# Altium PCB FAT51.PcbDoc
Units mm, origin at the board's own origin, x right, y up, seen from the top; angles counter-clockwise.
Board outline 497.18 x 312.08 mm, 2 copper layers (Top Layer, Bottom Layer); 125 components, 622 nets, 417 pads, 125 vias.
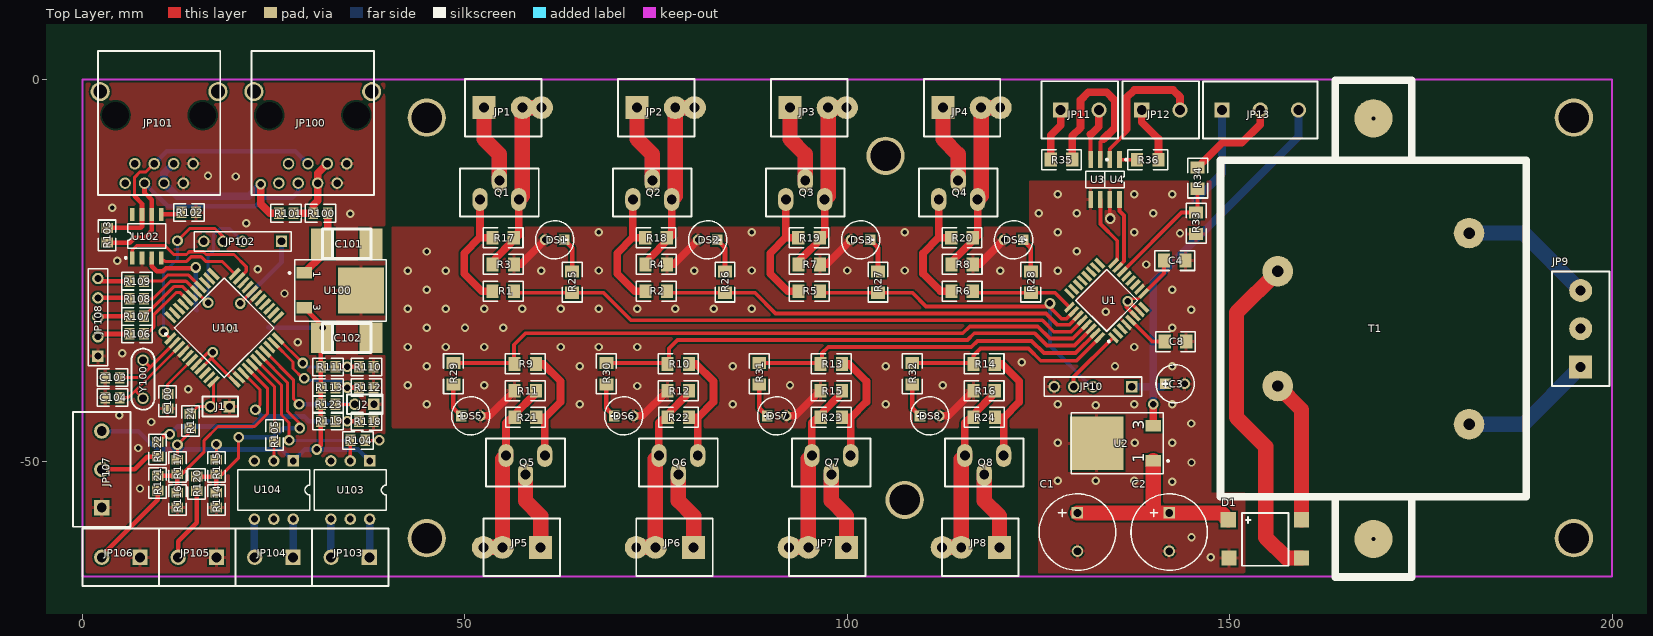
[diagram p0: Top Layer view]
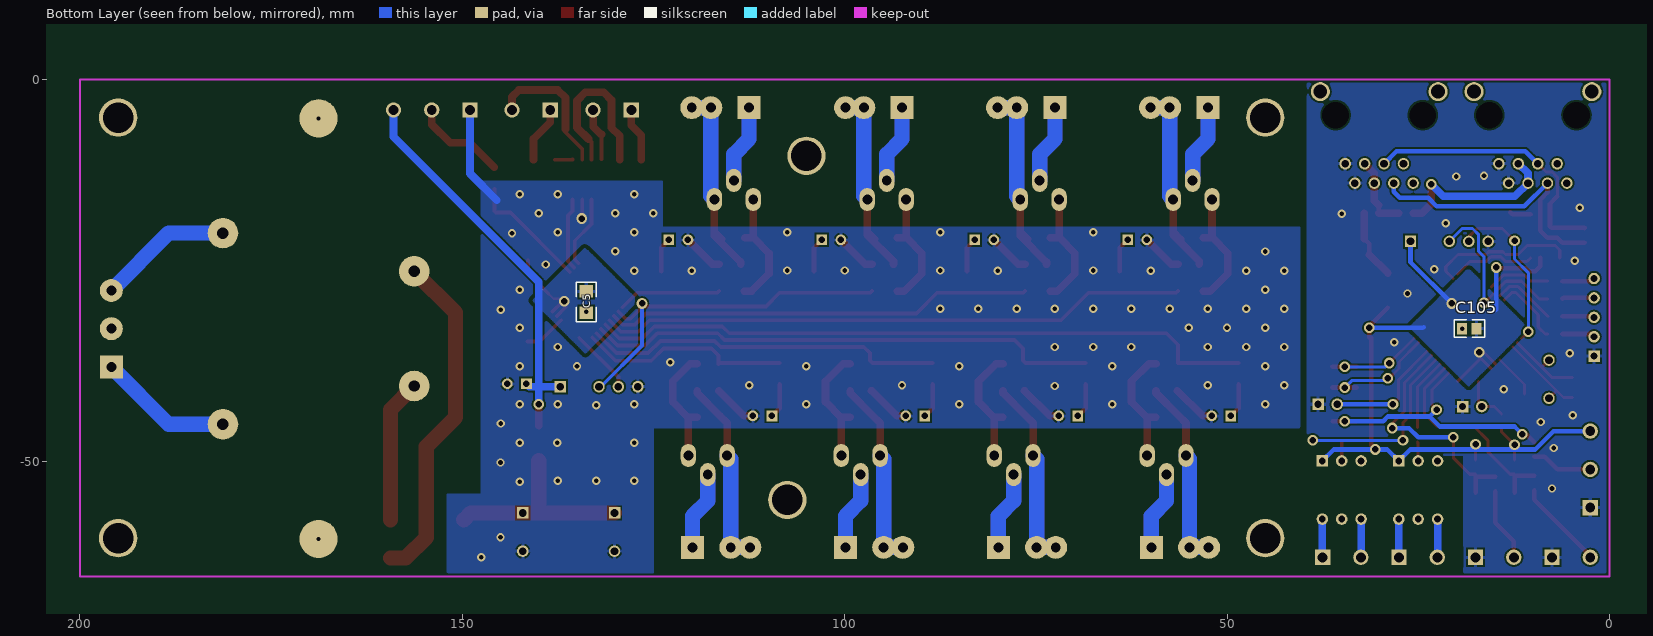
[diagram p1: Bottom Layer view, seen from below]

## Layer stack, top to bottom
Top Layer: signal copper 0.0356
Dielectric: dielectric 0.32, FR-4, Dk 4.8
Bottom Layer: signal copper 0.0356

## Board outline
-16.394,-120.931 -16.394,181.669 480.781,181.669 480.781,-130.406 -16.394,-130.406

## Design rules (kind name [scope] priority, off if disabled: settings)
Clearance Clearance_2 [InPoly vs HasPad('Free-0') Or
HasPad('Free-1') Or
HasPad('Free-2') Or
HasPad('Free-3') Or
HasPad('Free-4') Or
HasPad('Free-5') Or
HasPad('Free-6') Or
HasPad('Free-7') Or
HasPad('Free-8') Or
HasPad('Free-9') Or
HasPad('Free-10') Or
HasPad('Free-11') Or
HasPad('Free-12')] p1: gap=2
Clearance Clearance_1 [InPoly vs InPoly] p2: gap=0.5
Clearance [All] p3: gap=0.254
ComponentClearance [All] p1: gap=0.254 collisioncheckmode=0
HoleSize [All] p1: absolutevalues=TRUE maxlimit=5 minlimit=0.025 maxpercent=80.000 minpercent=20.000
PolygonConnect PolygonConnect_1 [InNet('GND_H') or  InNet('+27v')] p1: connectstyle=Relief reliefconductorwidth=0.8 reliefentries=4 polygonreliefangle="90 Angle"
PolygonConnect [All] p2: connectstyle=Relief reliefconductorwidth=0.4 reliefentries=4 polygonreliefangle="90 Angle"
RoutingLayers [All] p1: top layer=Horizontal bottom layer=Vertical
RoutingVias [All] p1: holewidth=0.85 width=1.4 viastyle="Through Hole" minholewidth=0.5 minwidth=1 maxholewidth=1 maxwidth=1.5
SolderMaskExpansion [All] p1: expansion=0.102
TestPointUsage [All] p1: valid=0 allowmultiple=FALSE
Testpoint [All] p1: side=15 testpointundercomponent=TRUE minsize=1.016 maxsize=2.54 preferedsize=1.524 minholesize=0 maxholesize=1.016 preferedholesize=0.813 testpointgrid=0.025 style=1023 order=-539222988
Width [All] p1: maxlimit=2 minlimit=0.254 preferedwidth=0.254 toplayer_minwidth=0.3 toplayer_prefwidth=0.3 bottomlayer_minwidth=0.3 bottomlayer_prefwidth=1 minimp=50.000000 maximp=50.000000 favimp=50.000000
15 further rules are at their usual default settings.

## Classes and differential pairs
component class fat51p: C1 C2 C3 C4 C5 C8 D1 DS1 DS2 DS3 DS4 DS5 DS6 DS7 DS8 JP1 JP2 JP3 JP4 JP5 JP6 JP7 JP8 JP9 JP10 JP11 JP12 JP13 Q1 Q2 Q3 Q4 Q5 Q6 Q7 Q8 R1 R2 R3 R4 R5 R6 R7 R8 R9 R10 R11 R12 R13 R14 R15 R16 R17 R18 R19 R20 R21 R22 R23 R24 R25 R26 R27 R28 R29 R30 R31 R32 R33 R34 R35 R36 T1 U1 U2 U3 U4
component class UD: C100 C101 C102 C103 C104 C105 J1 J2 JP100 JP101 JP102 JP103 JP104 JP105 JP106 JP107 JP108 R100 R101 R102 R103 R104 R105 R106 R107 R108 R109 R110 R111 R112 R113 R114 R115 R116 R117 R118 R119 R120 R121 R122 R123 R124 U100 U101 U102 U103 U104 Y100

## Components (designator, comment, footprint, x,y, rotation, side; value= is the part's Value field where it differs from the comment)
C1 "" el5 130.1,-61.7 r90 top
C2 "" el5 142.1,-61.7 r90 top
C3 "" el3 141.6,-39.8 r0 top
C4 "Cap" _1206 142.8,-23.7 r180 top
C5 "Cap" _1206 133.8,-29.1 r90 bottom
C8 "1.0" _1206 142.9,-34.3 r180 top
C100 "1.0" _0805 11.1,-42.1 r90 top
C101 "10.0x25 tantal" CAP_EL_6_3 31.4,-21.5 r0 top
C102 "10.0x25 tantal" CAP_EL_6_3 31.4,-33.8 r0 top
C103 "10pF" _0805 3.9,-39 r0 top
C104 "10pF" _0805 3.9,-41.6 r0 top
C105 "1.0" _0805 18.306,-32.6 r0 bottom
D1 "DB107" DF01 159.4,-62.6 r180 top
DS1 "LED0" el3 63,-21 r180 top
DS2 "LED0" el3 83,-21 r180 top
DS3 "LED0" el3 103,-21 r180 top
DS4 "LED0" el3 123,-21 r180 top
DS5 "LED0" el3 49.5,-44 r0 top
DS6 "LED0" el3 69.5,-44 r0 top
DS7 "LED0" el3 89.5,-44 r0 top
DS8 "LED0" el3 109.5,-44 r0 top
J1 "" jmp 19.2,-42.8 r180 top
J2 "" jmp 38.1,-42.5 r180 top
JP1 "BT5-2" BT5-2-1#1 55,-3.7 r0 top
JP2 "BT5-2" BT5-2-1#1 75,-3.7 r0 top
JP3 "BT5-2" BT5-2-1#1 95,-3.7 r0 top
JP4 "BT5-2" BT5-2-1#1 115,-3.7 r0 top
JP5 "BT5-2" BT5-2-1#1 57.4,-61.2 r180 top
JP6 "BT5-2" BT5-2-1#1 77.4,-61.2 r180 top
JP7 "BT5-2" BT5-2-1#1 97.4,-61.2 r180 top
JP8 "BT5-2" BT5-2-1#1 117.4,-61.2 r180 top
JP9 "Header 3" BT5-3#1 195.9,-37.6 r90 top
JP10 "" HDR1X5_uart 137.2,-40.2 r180 top
JP11 "BT5-2" BT5-2-1#2 130.4,-4 r0 top
JP12 "BT5-2" BT5-2-1#2 141,-4 r0 top
JP13 "Header 3" BT5-3#2 149,-4 r0 top
JP100 "MHDR1X8" 8i8p-5306 30.1,-12.3 r180 top
JP101 "MHDR1X8" 8i8p-5306 10,-12.3 r180 top
JP102 "" HDR1X5_uart 26,-21.2 r180 top
JP103 "BT5-2" BT5-2-1#2 35,-62.5 r180 top
JP104 "BT5-2" BT5-2-1#2 25,-62.5 r180 top
JP105 "BT5-2" BT5-2-1#2 15,-62.5 r180 top
JP106 "BT5-2" BT5-2-1#2 5,-62.5 r180 top
JP107 "Header 3" BT5-3#2 2.5,-56 r90 top
JP108 "Header 5" HDR1X5 2,-36.2 r90 top (schematic designator JP9)
Q1 "IRF1407" 7805_2 56,-15.7 r0 top
Q2 "IRF1407" 7805_2 76,-15.7 r0 top
Q3 "IRF1407" 7805_2 96,-15.7 r0 top
Q4 "IRF1407" 7805_2 116,-15.7 r0 top
Q5 "IRF1407" 7805_2 56.4,-49.2 r180 top
Q6 "IRF1407" 7805_2 76.4,-49.2 r180 top
Q7 "IRF1407" 7805_2 96.4,-49.2 r180 top
Q8 "IRF1407" 7805_2 116.4,-49.2 r180 top
R1 "1K0" _1206 55,-27.7 r180 top
R2 "1K0" _1206 75,-27.7 r180 top
R3 "1K0" _1206 55,-24.2 r180 top
R4 "1K0" _1206 75,-24.2 r180 top
R5 "1K0" _1206 95,-27.7 r180 top
R6 "1K0" _1206 115,-27.7 r180 top
R7 "1K0" _1206 95,-24.2 r180 top
R8 "1K0" _1206 115,-24.2 r180 top
R9 "1K0" _1206 57.9,-37.2 r0 top
R10 "1K0" _1206 77.9,-37.2 r0 top
R11 "1K0" _1206 57.9,-40.7 r0 top
R12 "1K0" _1206 77.9,-40.7 r0 top
R13 "1K0" _1206 97.9,-37.2 r0 top
R14 "1K0" _1206 117.9,-37.2 r0 top
R15 "1K0" _1206 97.9,-40.7 r0 top
R16 "1K0" _1206 117.9,-40.7 r0 top
R17 "20K" _1206 55,-20.7 r0 top
R18 "20K" _1206 75,-20.7 r0 top
R19 "20K" _1206 95,-20.7 r0 top
R20 "20K" _1206 115,-20.7 r0 top
R21 "20K" _1206 57.9,-44.2 r180 top
R22 "20K" _1206 77.9,-44.2 r180 top
R23 "20K" _1206 97.9,-44.2 r180 top
R24 "20K" _1206 117.9,-44.2 r180 top
R25 "1K0" _1206 64,-26.5 r90 top
R26 "1K0" _1206 84,-26.5 r90 top
R27 "1K0" _1206 104,-26.5 r90 top
R28 "1K0" _1206 124,-26.5 r90 top
R29 "1K0" _1206 48.5,-38.5 r270 top
R30 "1K0" _1206 68.5,-38.5 r270 top
R31 "1K0" _1206 88.5,-38.5 r270 top
R32 "1K0" _1206 108.5,-38.5 r270 top
R33 "1K0" _1206 145.6,-18.8 r90 top
R34 "1K0" _1206 145.8,-12.9 r90 top
R35 "1K0" _1206 128,-10.5 r180 top
R36 "1K0" _1206 139.3,-10.5 r0 top
R100 "1R0" _0805 31.1,-17.5 r0 top
R101 "1R0" _0805 26.6,-17.5 r0 top
R102 "1R0" _0805 13.9,-17.4 r180 top
R103 "K10" _0805 3.2,-20.4 r90 top
R104 "1K0" _0805 36,-47.2 r0 top (schematic designator R?)
R105 "1K0" _0805 25.1,-46.5 r90 top (schematic designator R?)
R106 "1K0" _0805 7.1,-33.3 r180 top (schematic designator R25)
R107 "1K0" _0805 7.1,-31 r180 top (schematic designator R26)
R108 "1K0" _0805 7.1,-28.7 r180 top (schematic designator R27)
R109 "1K0" _0805 7.1,-26.4 r180 top (schematic designator R28)
R110 "1K0" _0805 37.1,-37.6 r0 top
R111 "1K0" _0805 32.1,-37.6 r0 top
R112 "1K0" _0805 37.1,-40.3 r0 top
R113 "1K0" _0805 32.1,-40.3 r0 top
R114 "1K0" _0805 17.5,-55 r270 top
R115 "1K0" _0805 17.5,-50.7 r90 top
R116 "1K0" _0805 12.4,-55 r270 top
R117 "1K0" _0805 12.4,-50.7 r90 top
R118 "1K0" _0805 37.1,-44.7 r0 top
R119 "1K0" _0805 32.1,-44.7 r180 top
R120 "K10" _0805 14.9,-52.9 r90 top
R121 "K10" _0805 9.8,-52.8 r90 top
R122 "K10" _0805 9.8,-48.4 r90 top
R123 "1K0" _0805 32.1,-42.5 r0 top
R124 "1K0" _0805 14.1,-44.7 r90 top
T1 "BV EI 422 1222" "BV EI 422 1226_L" 168.8,-32.6 r90 top
U1 "STM8S105K" QFP7X7-G32/X.5N 133.9,-28.9 r135 top
U2 "MC78M05CDT" SIP-G3/Z11.05#1 136.3,-47.6 r90 top
U3 "Optoisolator1" SO-G4 133.1,-10.5 r180 top
U4 "Optoisolator1" SO-G4 135.6,-10.5 r180 top
U100 "MC78M05CDT" SIP-G3/Z11.05#2 32.7,-27.6 r270 top
U101 "STM8S208S6" QFP10X10-G44/G10N 18.5,-32.5 r45 top
U102 "TJA1050" SO-G8/D5 8.4,-20.5 r0 top
U103 "Opto TRIAC" dip-6 35,-53.7 r180 top
U104 "Opto TRIAC" dip-6 25,-53.7 r180 top
Y100 "10MHz" QWARZ1 7.9,-36.7 r270 top

## Footprints (in the part's own frame and the unit in brackets; to place one, negate y for a bottom-side part, rotate by r counter-clockwise, add the part's x,y. Pads: shape width x height; smd on the part's side, far side on the other; paste and mask are expansions set on the pad)
8i8p-5306 [mm]
  round 2.5 hole 1.8: 0(-7.7,-10.7) 0(7.7,-10.7)
  round 1.5 hole 3.5: 0(-5.7,-7.62) 0(5.7,-7.62)
  round 1.5 hole 1: 1(-4.445,-1.27) 2(-3.175,1.27) 3(-1.905,-1.27) 4(-0.635,1.27) 5(0.635,-1.27) 6(1.905,1.27) 7(3.175,-1.27) 8(4.445,1.27)
  silkscreen extent -8,-16 8,2.8
7805_2 [mm]
  oval 2x3 hole 1.3: 1(-4.042,-0.011) 2(-1.502,2.489) 3(1.038,-0.011)
  silkscreen extent -6.65,-2.21 3.65,4.05
_0805 [mm]
  rect 1.3x1.5 smd: 1(-0.942,-0.005) 2(0.958,-0.005)
  silkscreen extent -1.99,-1.16 2.01,1.14
_1206 [mm]
  rect 1.6x1.8 smd: 1(-1.412,-0.007) 2(1.388,-0.007)
  silkscreen extent -2.61,-1.31 2.59,1.29
BT5-2-1#1 [mm]
  round 2 on Top Overlay: 0(-2.5,-4)
  rect 3x3 hole 1.3: 1(-2.5,0)
  round 3 hole 1.3: 2(2.5,0)
  silkscreen extent -5,-3.75 5,3.75
BT5-2-1#2 [mm]
  round 2 on Top Overlay: 0(-2.5,-4)
  rect 2x2 hole 1.3: 1(-2.5,0)
  round 2 hole 1.3: 2(2.5,0)
  silkscreen extent -5,-3.75 5,3.75
BT5-3#1 [mm]
  round 2 on Top Overlay: 0(-0.001,-4.001)
  rect 3x3 hole 1.3: 1(-0.001,-0.001)
  round 3 hole 1.3: 2(4.999,-0.001) 3(9.999,-0.001)
  silkscreen extent -2.5,-3.75 12.5,3.75
BT5-3#2 [mm]
  round 2 on Top Overlay: 0(-0.001,-4.001)
  rect 2x2 hole 1.3: 1(-0.001,-0.001)
  round 2 hole 1.3: 2(4.999,-0.001) 3(9.999,-0.001)
  silkscreen extent -2.5,-3.75 12.5,3.75
"BV EI 422 1226_L" [mm]
  round 5 hole 0.5: 0(-27.5,0) 0(27.5,0)
  round 4 hole 1.5: 1(-12.5,-12.5) 5(12.5,-12.5) 7(-7.5,12.5) 9(7.5,12.5)
  silkscreen extent -32.47,-20 32.47,20
CAP_EL_6_3 [mm]
  rect 3x4 smd: 1(-0.011,0.006) 2(6.339,0.006)
  silkscreen extent -0.01,-1.9 6.34,1.91
DF01 [mm]
  rect 2x2 smd: 1(9.496,0.002) 2(-0.004,0.002) 3(9.596,-4.998) 4(-0.004,-4.998)
  silkscreen extent 1.7,-5.9 7.8,1
dip-6 [mm]
  rect 1.5x1.5 hole 0.9: 1(-2.54,-3.81)
  round 1.5 hole 0.9: 2(0,-3.81) 3(2.54,-3.81) 4(2.54,3.81) 5(0,3.81) 6(-2.54,3.81)
  silkscreen extent -4.7,-2.65 4.7,2.65
el3 [mm]
  rect 1.4x1.4 hole 0.85: 1(0.011,-0.008)
  round 1.4 hole 0.85: 2(2.511,-0.008)
  silkscreen extent -1.23,-2.51 3.76,2.49
el5 [mm]
  rect 1.5x1.5 hole 1: 1(5.001,0.007)
  round 1.5 hole 1: 2(0.001,0.007)
  silkscreen extent -2.5,-4.99 7.5,5
HDR1X5 [mm]
  rect 1.5x1.5 hole 0.9: 1(0,0)
  round 1.5 hole 0.9: 2(2.54,0) 3(5.08,0) 4(7.62,0) 5(10.16,0)
  silkscreen extent -1.27,-1.27 11.43,1.27
HDR1X5_uart [mm]
  rect 1.5x1.5 hole 1: 1(-0.008,-0.009)
  round 1.5 hole 1: 3(5.072,-0.009) 4(7.612,-0.009) 5(10.152,-0.009)
  silkscreen extent -1.28,-1.28 11.42,1.26
jmp [mm]
  rect 1.5x1.5 hole 0.95: 1(0.008,-0.012)
  round 1.5 hole 0.95: 2(2.508,-0.012)
  silkscreen extent -1.09,-1.31 3.51,1.29
QFP7X7-G32/X.5N [mm]
  rect 1.65x0.5 smd: 1(-4.082,2.794) 2(-4.082,1.994) 3(-4.082,1.194) 4(-4.082,0.394) 5(-4.082,-0.406) 6(-4.082,-1.206) 7(-4.082,-2.006) 8(-4.082,-2.806) 17(4.068,-2.806) 18(4.068,-2.006) 19(4.068,-1.206) 20(4.068,-0.406) 21(4.068,0.394) 22(4.068,1.194) 23(4.068,1.994) 24(4.068,2.794)
  rect 0.5x1.65 smd: 9(-2.807,-4.081) 10(-2.007,-4.081) 11(-1.207,-4.081) 12(-0.407,-4.081) 13(0.393,-4.081) 14(1.193,-4.081) 15(1.993,-4.081) 16(2.793,-4.081) 25(2.793,4.069) 26(1.993,4.069) 27(1.193,4.069) 28(0.393,4.069) 29(-0.407,4.069) 30(-1.207,4.069) 31(-2.007,4.069) 32(-2.807,4.069)
  silkscreen extent -4.13,-2.86 2.84,3.72
QFP10X10-G44/G10N [mm]
  rect 1.9x0.5 smd: 1(-5.943,3.998) 2(-5.943,3.198) 3(-5.943,2.398) 4(-5.943,1.598) 5(-5.943,0.798) 6(-5.943,-0.002) 7(-5.943,-0.802) 8(-5.943,-1.602) 9(-5.943,-2.402) 10(-5.943,-3.202) 11(-5.943,-4.002) 23(5.957,-4.002) 24(5.957,-3.202) 25(5.957,-2.402) 26(5.957,-1.602) 27(5.957,-0.802) 28(5.957,-0.002) 29(5.957,0.798) 30(5.957,1.598) 31(5.957,2.398) 32(5.957,3.198) 33(5.957,3.998)
  rect 0.5x1.9 smd: 12(-3.993,-5.952) 13(-3.193,-5.952) 14(-2.393,-5.952) 15(-1.593,-5.952) 16(-0.793,-5.952) 17(0.007,-5.952) 18(0.807,-5.952) 19(1.607,-5.952) 20(2.407,-5.952) 21(3.207,-5.952) 22(4.007,-5.952) 34(4.007,5.948) 35(3.207,5.948) 36(2.407,5.948) 37(1.607,5.948) 38(0.807,5.948) 39(0.007,5.948) 40(-0.793,5.948) 41(-1.593,5.948) 42(-2.393,5.948) 43(-3.193,5.948) 44(-3.993,5.948)
  silkscreen extent -6.07,-4.6 4.61,4.92
QWARZ1 [mm]
  round 1.5 hole 1: 1(0.008,0) 2(5.008,0)
  silkscreen extent -1.49,-1.5 6.51,1.5
SIP-G3/Z11.05#1 [mm]
  rect 1.5x2 smd: 1(-2.283,-3.709) 3(2.287,-3.709)
  rect 7x7 smd: 4(0.002,3.691)
  silkscreen extent -4,-5.76 4,7.02
SIP-G3/Z11.05#2 [mm]
  rect 1.5x2 smd: 1(-2.283,-3.709) 3(2.287,-3.709)
  rect 6x6 smd: 4(0.002,3.691)
  silkscreen extent -4,-5.76 4,7.02
SO-G4 [mm]
  rect 0.6x2.2 smd: 1(0.003,0) 2(1.273,0) 3(1.273,5.2) 4(0.003,5.2)
  silkscreen extent -0.97,-0.13 1.91,3.7
SO-G8/D5 [mm]
  rect 0.6x1.7 smd: 1(-1.908,-2.852) 2(-0.638,-2.852) 3(0.632,-2.852) 4(1.902,-2.852) 5(1.902,2.848) 6(0.632,2.848) 7(-0.638,2.848) 8(-1.908,2.848)
  silkscreen extent -2.88,-2.98 2.5,1.6

## Part data
C1 C2 C101 C102: library part "Cap Pol1", "Polarized Capacitor (Radial)"
C3: library part "Cap Pol", "Polarized Capacitor (Radial)"
C4 C5: "Capacitor"
C8 C100 C103 C104 C105: library part "Cap Semi", "Capacitor (Semiconductor SIM Model)"
D1: library part Bridge1, "Full Wave Diode Bridge"
DS1 DS2 DS3 DS4 DS5 DS6 DS7 DS8: "Typical INFRARED GaAs LED"
J1 J2: library part JMP, "Switch"
JP1 JP2 JP3 JP4 JP5 JP6 JP7 JP8 JP9 JP11 JP12 JP13 JP103 JP104 JP105 JP106 JP107: "Header, 3-Pin"
JP10 JP102: library part SWIM_CONN
JP100 JP101: "Header, 8-Pin"
JP108: "Header, 5-Pin"
Q1 Q2 Q3 Q4 Q5 Q6 Q7 Q8: library part IRFR120, "HEXFET N-Channel Power MOSFET"
R1 R2 R3 R4 R5 R6 R7 R8 R9 R10 R11 R12 R13 R14 R15 R16 R17 R18 R19 R20 R21 R22 R23 R24 R25 R26 R27 R28 R29 R30 R31 R32 R33 R34 R35 R36 R100 R101 R102 R103 R104 R105 R106 R107 R108 R109 R110 R111 R112 R113 R114 R115 R116 R117 R118 R119 R120 R121 R122 R123 R124: library part Res2, "Resistor"
T1: library part "BV EI 302"
U2 U100: "Three-Terminal Medium Current Positive Voltage Regulator"
U3 U4: "Optoisolator"
U103 U104: "Opto-Triac"
Y100: library part XTAL, "Crystal Oscillator"

## Free pads (board coordinates)
  round 3 hole 1.3: 0(52.4,-61.2) 1(72.4,-61.2) 2(92.4,-61.2) 3(112.4,-61.2) 4(60,-3.7) 5(80,-3.7) 6(99.9,-3.7) 7(120,-3.7)
  round 5 hole 4: 21(45,-60) 21(45,-5) 21(105,-10) 21(107.5,-55) 21(195,-60) 21(195,-5)

## Via types
v1: diameter 1.1, hole 0.6, Top Layer to Bottom Layer, 98 vias
v2: diameter 1.4, hole 0.85, Top Layer to Bottom Layer, 27 vias

## Nets (pads, with @x,y where several pads share a name; then routed paths per layer and width w, separated by ;. In a path a pad name is that pad's centre, name@x,y a point inside that pad or via, vN(x,y) a via of type N, cw(c..) or ccw(c..) an arc to the next point about the centre after c; other vN are vias at no path point)
+3V3: 
+5V: C3.1 C4.2 C5.2 JP10.1 JP13.3 U1.6 U1.7 U1.9 U2.3 | length 66
  Top Layer w0.3: v2(136.666,-29.034) 137,-28.7 138.07,-28.7 U1.9
  Top Layer w0.5: v2@136.5,-29.1 136.5,-29.794 U1.6 ; v2@136.666,-29.1 136.937,-29.1 U1.7 ; U1.9 141.412,-25.358 C4.2
  Top Layer w1: U2.3 v2@140.009,-42.509
  Bottom Layer w1: JP10.1 141.229,-40.191 C3.1 ; v2(140,-42.5) 140,-26.5 158.999,-7.501 JP13.3
+5V_UD: C102.1 C105.1 JP102.1 JP107.3 R111.1 R113.1 R115.2 R117.2 R119.2 R123.1 R124.1 U100.3 U101.7 U101.8 U101.12 U101.29 U102.3 U103.1 U104.1 | length 109.1
  Top Layer w0.4: R117.2 12.405,-47.795 14.105,-46.095 R124.1 ; U101.7 16.434,-35.7 v2(17,-35.7) 17,-36.647 U101.12 ; U101.8 v2@17,-36.265 ; R115.2 v2@17.505,-47.705 ; v2(20.6,-29.3) 20.6,-29.271 U101.29
  Top Layer w0.6: U102.3 9.032,-24.432 9.7,-25.1 10.5,-25.1 10.9,-24.7 14.6,-24.7 14.7,-24.6 v2(14.8,-24.6) ; U100.3 31.389,-32.286 C102.1 ; v2(30.6,-48.4) 31.142,-47.858 C102.1@31.142,-33.794 ; C102.1@31.142,-32.748 v2(31.389,-32.5)
  Bottom Layer w0.6: JP107.3 7.301,-46.001 9.7,-48.4 26.05,-48.4 U104.1 29.03,-48.4 36.05,-48.4 U103.1 ; v2@12.4,-48.4 v2(12.4,-47.8) ; v2(14.8,-24.6) 14.8,-30.094 14.906,-30.2 ; v2@17.5,-48.4 v2(17.5,-47.7) ; v2(20.6,-29.3) 26.008,-23.892 JP102.1 ; 24.3,-32.407 24.393,-32.5 v2(31.389,-32.5) v2@31.389,-32.789
+5VI: 
+12V: 
+12VF: 
+12VI: 
A: 
A1: 
A2: 
A3: 
A4: U101.9
A5: U101.10
A6: J1.2 R124.2 U101.11 | length 6.4
  Top Layer w0.4: R124.2 15.058,-42.788 J1.2 17.127,-42.353 U101.11
AA: 
AGND: 
AREF: 
AVCC: 
AVCCM: 
B: 
B0: R112.1 R113.2 U101.21 | length 15.9
  Top Layer w0.4: U101.21 27.5,-36.965 27.5,-37.8 28.8,-39.1 v2@28.8,-39.4
  Top Layer w0.6: R113.2@33.042,-40.295 R112.1@36.242,-40.295
  Bottom Layer w0.4: v2@28.8,-39.4 33.7,-39.4 v2(34.6,-40.3)
  other v2: 29,-39.1
B2: J2.2 R123.2 U101.19 | length 18.6
  Top Layer w0.4: U101.19 27.6,-39.328 27.6,-41.8 v2(28.3,-42.5) ; R123.2 33.063,-42.5 J2.2@35.58,-42.5
  Bottom Layer w0.6: v2(28.3,-42.5) 35.58,-42.5 J2.2
B3: R114.1 R115.1 R120.2 U101.18 | length 31.5
  Top Layer w0.4: R115.1 18.258,-51.642 20.4,-49.5 v2(20.4,-46.8) ; U101.18 26.8,-39.659 26.8,-43.4 28.4,-45 v2(28.4,-45.6)
  Top Layer w0.6: R120.2 17.358,-51.942 R115.1@17.5,-51.8 ; R114.1 R115.1@17.495,-51.805
  Bottom Layer w0.6: v2(20.4,-46.8) 25,-46.8 26.2,-45.6 v2(28.4,-45.6)
B4: R104.2 U101.17 | length 25.9
  Top Layer w0.4: U101.17 26,-39.99 26,-43.9 27,-44.9 v2(27,-47.2) ; R104.2 38.795,-47.205 v2(38.8,-47.2)
  Bottom Layer w0.4: v2(27,-47.2) v2(38.8,-47.2)
B5: R105.2 U101.16 | length 9.5
  Top Layer w0.4: U101.16 25.105,-40.227 R105.2
B6: R116.1 R117.1 R121.2 U101.15 | length 27.7
  Top Layer w0.4: R117.1 12.958,-51.642 15.9,-48.7 15.9,-47.2 17.7,-45.4 22.5,-45.4 24.2,-43.7 24.2,-40.453 U101.15
  Top Layer w0.6: R121.2 12.358,-51.842 12.395,-51.878 R116.1
B7: R118.1 R119.1 R122.2 U101.14 | length 36.8
  Top Layer w0.4: U101.14 23.2,-40.584 23.2,-42.6 v2(22.6,-43.2)
  Top Layer w0.6: R122.2 10.847,-46.4 v2(11.4,-46.4) ; R119.1 34.595,-44.695 v2(34.6,-44.7) 36.153,-44.7 R118.1
  Bottom Layer w0.6: v2(11.4,-46.4) 12.4,-45.4 22.2,-45.4 23,-44.6 23.517,-44.083 28.983,-44.083 29.595,-44.695 v2@34.595,-44.695 ; v2(22.6,-43.2) 23.483,-44.083
BB: 
C: 
CC: 
CRX: U101.33 U102.4 | length 11
  Top Layer w0.4: U102.4 10.75,-23.8 13.6,-23.8 14.2,-23.2 15.5,-23.2 16.1,-23.8 18.224,-23.8 U101.33
CS1: 
CS2: 
CS3: 
CTX: U101.32 U102.1 | length 19.6
  Top Layer w0.4: U102.1 6.492,-22.308 7.1,-21.7 10.7,-21.7 11.9,-22.9 13.575,-22.9 13.929,-22.546 15.771,-22.546 16.125,-22.9 19.8,-22.9 21.4,-24.5 21.4,-25.077 U101.32
D: 
D0: R109.1 U101.37 | length 8.4
  Top Layer w0.4: R109.1 10.305,-26.395 11.1,-25.6 13.872,-25.6 U101.37
D0I: 
D1: JP102.3 R108.1 U101.38 | length 24.5
  Top Layer w0.4: R108.1 9.205,-28.695 11.5,-26.4 13.541,-26.4 16.341,-29.2 v2(16.4,-29.2)
  Bottom Layer w0.4: v2(16.4,-29.2) 16.4,-23.2 17.1,-22.5 17.1,-20.3 17.9,-19.5 19.237,-19.5 JP102.3
D2: R107.1 U101.39 | length 8.4
  Top Layer w0.4: R107.1 11.937,-27.1 13.11,-27.1 U101.39
D3: R106.1 U101.40 | length 9.3
  Top Layer w0.4: R106.1 8.405,-33.295 9.3,-32.4 9.3,-30.8 12.2,-27.9 12.778,-27.9 U101.40
DAC_OUT: 
DAC_OUT: 
DD: 
DGND: 
E: 
E6: R110.1 R111.2 U101.22 | length 13.9
  Top Layer w0.4: U101.22 28.766,-37.1 v2(28.8,-37.1)
  Top Layer w0.6: R111.2@33.042,-37.595 R110.1@36.242,-37.595
  Bottom Layer w0.4: v2(28.8,-37.1) 29.3,-37.6 v2@34.7,-37.6
  other v2: 34.6,-37.595
EE: 
F: 
F_OUT: 
FF: 
G: 
GG: 
GND: C1.2 C2.2 C3.2 C4.1 C5.1 C8.1 D1.1 DS1.2 DS2.2 DS3.2 DS4.2 DS5.2 DS6.2 DS7.2 DS8.2 JP10.5 JP13.1 R3.1 R4.1 R7.1 R8.1 R11.1 R12.1 R15.1 R16.1 R33.1 U1.4 U1.10 U2.4 U3.3 U4.3 | length 60.8
  Top Layer w0.5: U4.3 134.327,-18.127 v2(134.4,-18.2)
  Top Layer w1: DS5.2 53.186,-44.008 R11.1 ; R3.1 57.287,-24.193 DS1.2 ; DS6.2 73.186,-44.008 R12.1 ; R4.1 77.287,-24.193 DS2.2 ; DS7.2 93.186,-44.008 R15.1 ; R7.1 97.287,-24.193 DS3.2 ; DS8.2 113.186,-44.008 R16.1 ; R8.1 117.287,-24.193 DS4.2
  Bottom Layer w1: 145.506,-15.8 148.999,-12.307 JP13.1
  other v1: 147.5,-62.507 145.006,-59.9 145.006,-59.9 142.5,-52.607 127.5,-52.507 132.506,-52.5 137.506,-52.5 145.006,-50.1 127.5,-47.507 137.6,-47.507 142.5,-47.507 145,-45.007 132.506,-42.6 45,-42.507 65,-42.507 85,-42.507 105,-42.507 127.506,-42.5 137.5,-42.507 142.506,-42.5 72.506,-40.1 42.5,-40.007 52.506,-40 92.5,-40.007 112.5,-40.007 45,-37.507 65,-37.507 85.006,-37.5 105,-37.507 135,-37.507 142.5,-37.507 122.8,-37.007 42.506,-35 47.506,-35 52.506,-35 62.506,-35 67.506,-35 72.506,-35 137.506,-35 45,-32.507 55,-32.507 142.5,-32.507 50.006,-32.5 133.806,-30.4 145,-30.107 42.5,-30.007 47.5,-30.007 52.506,-30 57.506,-30 62.506,-30 67.506,-30 72.506,-30 77.5,-30.007 82.506,-30 87.506,-30 45.006,-27.5 142.506,-27.5 42.5,-25.007 47.5,-25.007 60,-25.007 67.506,-25 80,-25.007 87.506,-25 100.006,-25 107.506,-25 120,-25.007 127.5,-25.007 139.1,-24.207 45,-22.507 130.006,-22.5 143.5,-20.107 67.5,-20.007 87.5,-20.007 107.5,-20.007 137.5,-20.007 127.506,-20 125.006,-17.5 130,-17.507 140.006,-17.5 142.5,-15.007 127.506,-15 137.506,-15
GNDI: 
GNDUD: C100.1 C101.2 C102.2 C103.1 C104.1 C105.2 J1.1 J2.1 JP100.1 JP100.2 JP101.1 JP101.2 JP102.5 JP105.1 JP106.1 JP107.1 JP108.1 R102.1 R110.2 R112.2 R114.2 R116.2 R118.2 U100.4 U101.4 U101.13 U101.28 U102.2
  other v1: 7.506,-53.5 7.3,-48.207 9,-44.807 4.8,-43.907 13.8,-40.507 5.206,-35.8 28.106,-34.4 19.265,-32.595 26.4,-28.007 22.9,-24.807 4.506,-23.7 21.406,-18.8 35.006,-17.6 3.9,-16.807 20.006,-12.7 16.4,-12.607
H: 
H2I: 
H2M: 
HH: 
NetC1_1: C1.1 C2.1 D1.3 U2.1 | length 26.9
  Top Layer w2: C1.1 148.901,-56.699 D1.3 ; 140,-56.699 140.009,-56.69 U2.1
NetC3_1: 
NetC4_1: 
NetC5_1: 
NetC8_2: C8.2 U1.5 | length 5.6
  Top Layer w0.5: U1.5 139.868,-34.293 C8.2
NetC12_2: 
NetC13_2: 
NetC14_1: 
NetC14_2: 
NetC15_1: 
NetC15_1: 
NetC15_1: 
NetC15_1: 
NetC15_1: 
NetC15_1: 
NetC15_1: 
NetC15_1: 
NetC15_1: 
NetC15_2: 
NetC16_1: 
NetC16_2: 
NetC18_1: 
NetC33_2: 
NetC34_2: 
NetC43_1: 
NetC46_1: 
NetC100_2: C100.2 U101.6 | length 5.8
  Top Layer w0.4: C100.2 11.105,-39.897 U101.6
NetC101_1: C101.1 R100.2 U100.1 | length 9.1
  Top Layer w0.6: C101.1@31.389,-22.919 C101.1 C101.1@32.058,-20.825
  Top Layer w1: U100.1 C101.1@31.389,-22.919 ; C101.1@32.058,-20.825 R100.2
NetD1_1: 
NetD1_2: D1.2 T1.9 | length 44.4
  Top Layer w2: T1.9 150.9,-30.5 150.9,-44.2 154.7,-48 154.7,-59.9 157.402,-62.602 D1.2
NetD1_4: D1.4 T1.7 | length 18.8
  Top Layer w2: T1.7 159.404,-43.204 D1.4
NetD2_1: 
NetD3_1: 
NetD4_1: 
NetD5_1: 
NetD6_1: 
NetD7_1: 
NetD8_1: 
NetD9_1: 
NetD10_1: 
NetD11_1: 
NetD12_1: 
NetD13_1: 
NetD14_1: 
NetD15_1: 
NetD16_1: 
NetD17_1: 
NetD18_1: 
NetDS1_1: DS1.1 R25.2 | length 4.5
  Top Layer w0.6: DS1.1 64.007,-22.01 R25.2
NetDS1_2: 
NetDS2_1: DS2.1 R26.2 | length 4.5
  Top Layer w0.6: DS2.1 84.007,-22.01 R26.2
NetDS2_2: 
NetDS3_1: DS3.1 R27.2 | length 4.5
  Top Layer w0.6: DS3.1 104.007,-22.01 R27.2
NetDS3_2: 
NetDS4_1: DS4.1 R28.2 | length 4.5
  Top Layer w0.6: DS4.1 124.007,-22.01 R28.2
NetDS4_2: 
NetDS5_1: DS5.1 R29.2 | length 4.5
  Top Layer w0.6: R29.2 48.493,-42.99 DS5.1
NetDS5_2: 
NetDS6_1: DS6.1 R30.2 | length 4.5
  Top Layer w0.6: R30.2 68.493,-42.99 DS6.1
NetDS6_2: 
NetDS7_1: DS7.1 R31.2 | length 4.5
  Top Layer w0.6: R31.2 88.493,-42.99 DS7.1
NetDS7_2: 
NetDS8_1: DS8.1 R32.2 | length 4.5
  Top Layer w0.6: R32.2 108.493,-42.99 DS8.1
NetDS8_2: 
NetDS9_2: 
NetDS10_2: 
NetDS11_2: 
NetDS12_2: 
NetDS13_2: 
NetDS14_2: 
NetDS15_2: 
NetDS16_2: 
NetHG6_1: 
NetHG6_2: 
NetHG6_3: 
NetHG6_4: 
NetHG6_5: 
NetHG6_6: 
NetHG6_7: 
NetHG6_9: 
NetHG6_10: 
NetHG7_3: 
NetHG8_3: 
NetJP1_1: JP1.1 Q1.2 | length 20.7
  Top Layer w2: JP1.1 52.5,-7.8 54.498,-9.798 Q1.2
  Bottom Layer w2: JP1.1 52.5,-7.8 54.498,-9.798 Q1.2
NetJP1_2: JP1.2 pad.4 Q1.3 R3.2 R17.2 | length 40.6
  Top Layer w1: R3.2 53.612,-23.788 56.54,-20.859 57.038,-20.362 Q1.3 ; R17.2@56.091,-20.91 R17.2@57.038,-19.962
  Top Layer w2: Q1.3 57.5,-15.249 JP1.2 pad.4
  Bottom Layer w2: Q1.3 57.5,-15.249 JP1.2 pad.4
NetJP2_1: JP2.1 Q2.2 | length 20.7
  Top Layer w2: JP2.1 72.5,-7.8 74.498,-9.798 Q2.2
  Bottom Layer w2: JP2.1 72.5,-7.8 74.498,-9.798 Q2.2
NetJP2_2: JP2.2 pad.5 Q2.3 R4.2 R18.2 | length 40.6
  Top Layer w1: R4.2 73.612,-23.888 77.038,-20.462 Q2.3 ; R18.2@76.091,-20.91 R18.2@77.038,-19.962
  Top Layer w2: Q2.3 77.5,-15.249 JP2.2 pad.5
  Bottom Layer w2: Q2.3 77.5,-15.249 JP2.2 pad.5
NetJP3_1: JP3.1 Q3.2 | length 20.7
  Top Layer w2: JP3.1 92.5,-7.8 94.498,-9.798 Q3.2
  Bottom Layer w2: JP3.1 92.5,-7.8 94.498,-9.798 Q3.2
NetJP3_2: JP3.2 pad.6 Q3.3 R7.2 R19.2 | length 40.6
  Top Layer w1: R7.2 93.612,-23.788 97.038,-20.362 Q3.3 ; R19.2@96.091,-20.91 R19.2@97.038,-19.962
  Top Layer w2: Q3.3 97.5,-15.249 JP3.2 pad.6@100,-3.7
  Bottom Layer w2: Q3.3 97.5,-15.249 JP3.2 pad.6@100,-3.7
NetJP4_1: JP4.1 Q4.2 | length 20.7
  Top Layer w2: JP4.1 112.5,-7.8 114.498,-9.798 Q4.2
  Bottom Layer w2: JP4.1 112.5,-7.8 114.498,-9.798 Q4.2
NetJP4_2: JP4.2 pad.7 Q4.3 R8.2 R20.2 | length 40.6
  Top Layer w1: R8.2 113.612,-23.888 117.038,-20.462 Q4.3 ; R20.2@116.091,-20.91 R20.2@117.038,-19.962
  Top Layer w2: Q4.3 117.5,-15.249 JP4.2 pad.7
  Bottom Layer w2: Q4.3 117.5,-15.249 JP4.2 pad.7
NetJP5_1: JP5.1 Q5.2 | length 20.7
  Top Layer w2: Q5.2 57.902,-55.102 59.9,-57.1 JP5.1
  Bottom Layer w2: Q5.2 57.902,-55.102 59.9,-57.1 JP5.1
NetJP5_2: JP5.2 pad.0 Q5.3 R11.2 R21.2 | length 39.5
  Top Layer w1: Q5.3 55.362,-44.938 56.309,-43.991 59.288,-41.012 R11.2
  Top Layer w2: pad.0 JP5.2 54.9,-49.651 Q5.3
  Bottom Layer w2: pad.0 JP5.2 54.9,-49.651 Q5.3
NetJP6_1: JP6.1 Q6.2 | length 20.7
  Top Layer w2: Q6.2 77.902,-55.102 79.9,-57.1 JP6.1
  Bottom Layer w2: Q6.2 77.902,-55.102 79.9,-57.1 JP6.1
NetJP6_2: JP6.2 pad.1 Q6.3 R12.2 R22.2 | length 39.5
  Top Layer w1: Q6.3 75.362,-44.938 76.309,-43.991 79.288,-41.012 R12.2
  Top Layer w2: pad.1 JP6.2 74.9,-49.651 Q6.3
  Bottom Layer w2: pad.1 JP6.2 74.9,-49.651 Q6.3
NetJP7_1: JP7.1 Q7.2 | length 20.7
  Top Layer w2: Q7.2 97.902,-55.102 99.9,-57.1 JP7.1
  Bottom Layer w2: Q7.2 97.902,-55.102 99.9,-57.1 JP7.1
NetJP7_2: JP7.2 pad.2 Q7.3 R15.2 R23.2 | length 39.5
  Top Layer w1: Q7.3 95.362,-44.938 96.309,-43.991 99.288,-41.012 R15.2
  Top Layer w2: pad.2 JP7.2 94.9,-49.651 Q7.3
  Bottom Layer w2: pad.2 JP7.2 94.9,-49.651 Q7.3
NetJP8_1: JP8.1 Q8.2 | length 20.7
  Top Layer w2: Q8.2 117.902,-55.102 119.9,-57.1 JP8.1
  Bottom Layer w2: Q8.2 117.902,-55.102 119.9,-57.1 JP8.1
NetJP8_2: JP8.2 pad.3 Q8.3 R16.2 R24.2 | length 39.5
  Top Layer w1: Q8.3 115.362,-44.938 116.309,-43.99 119.288,-41.012 R16.2
  Top Layer w2: pad.3 JP8.2 114.9,-49.651 Q8.3
  Bottom Layer w2: pad.3 JP8.2 114.9,-49.651 Q8.3
NetJP9_1: JP9.1 T1.1 | length 17.7
  Bottom Layer w2: T1.1 188.403,-45.1 JP9.1
NetJP9_2: JP9.2
NetJP9_3: JP9.3 T1.5 | length 17.7
  Bottom Layer w2: T1.5 188.4,-20.1 JP9.3
NetJP10_1: 
NetJP10_2: 
NetJP11_1: JP11.1 R35.2 | length 7
  Top Layer w1: R35.2 126.612,-7.288 127.9,-6 JP11.1
NetJP11_2: JP11.2 U3.2 | length 6.9
  Top Layer w0.5: U3.2@131.8,-10.4 131.8,-7.2
  Top Layer w1: 131.8,-7.2 131.9,-7.2 132.9,-6.2 JP11.2
NetJP12_1: JP12.1 R36.2 | length 7.4
  Top Layer w1: JP12.1 138.5,-5.6 140.688,-7.788 R36.2
NetJP12_2: JP12.2 U4.2 | length 18.4
  Top Layer w0.5: U4.2 134.327,-9.073 136.6,-6.8 136.6,-6.6
  Top Layer w1: 136.5,-6.5 136.5,-2.4 137.5,-1.4 142.6,-1.4 143.5,-2.3 JP12.2
NetJP13_1: 
NetJP13_2: JP13.2 R34.2 | length 12.4
  Top Layer w1: R34.2 149.019,-8.3 151.6,-8.3 153.999,-5.901 JP13.2
NetJP14_1: 
NetJP14_2: 
NetJP15_1: 
NetJP15_2: 
NetJP16_1: 
NetJP16_2: 
NetJP17_1: 
NetJP18_1: 
NetJP19_1: 
NetJP20_1: 
NetJP21_1: 
NetJP22_1: 
NetJP23_1: 
NetJP24_1: 
NetJP25_1: 
NetJP26_1: 
NetJP27_1: 
NetJP28_1: 
NetJP29_1: 
NetJP30_1: 
NetJP31_1: 
NetJP32_1: 
NetJP34_4: 
NetJP39_5: 
NetJP100_3: JP100.3 JP100.4 R100.1 R101.2 | length 9.8
  Top Layer w0.6: R100.1 30.158,-16.442
  Top Layer w1: R101.2 R100.1 ; 30.158,-16.442 30.735,-15.865 30.735,-12.3 JP100.3
NetJP100_5: JP100.5 JP101.5 R103.2 U102.7 | length 36.2
  Top Layer w0.4: 6.8,-15.3 6.8,-12.8 7.5,-12.1 8.295,-12.1 JP101.5
  Top Layer w0.6: R103.2 3.247,-19.4 7.6,-19.4 7.762,-19.238 7.762,-16.262 6.8,-15.3
  Bottom Layer w0.6: JP101.5 10.995,-9.4 27.835,-9.4 JP100.5
NetJP100_6: JP100.6 JP101.6 R103.1 U102.6 | length 36.4
  Top Layer w0.6: R103.1 6.158,-21.342 6.8,-20.7 8.132,-20.7 9.032,-19.8 9.032,-15.732 8.095,-14.795 JP101.6
  Bottom Layer w0.6: JP101.6 11.125,-16.6 22.6,-16.6 23.7,-15.5 27.4,-15.5 28.195,-14.705 JP100.6
NetJP101_3: JP101.3 JP101.4 R101.1 | length 22.6
  Top Layer w1: v2(23.3,-13.7) 23.3,-16.3 24.505,-17.505 R101.1
  Bottom Layer w1: JP101.3 10.635,-12.3 JP101.4 12.365,-15.3 21.7,-15.3 v2(23.3,-13.7)
NetJP103_1: JP103.1 U103.6 | length 5
  Bottom Layer w0.6: JP103.1 JP103.1@37.54,-62.46
  Bottom Layer w1: JP103.1@37.54,-62.46 U103.6
NetJP103_2: JP103.2 U103.4 | length 5
  Bottom Layer w0.6: JP103.2@32.46,-62.46 JP103.2
  Bottom Layer w1: JP103.2@32.46,-62.46 U103.4
NetJP104_1: JP104.1 U104.6 | length 5
  Bottom Layer w0.6: JP104.1 JP104.1@27.54,-62.46
  Bottom Layer w1: JP104.1@27.54,-62.46 U104.6
NetJP104_2: JP104.2 U104.4 | length 5
  Bottom Layer w0.6: JP104.2@22.46,-62.46 JP104.2
  Bottom Layer w1: JP104.2@22.46,-62.46 U104.4
NetJP105_2: JP105.2 R120.1 | length 9.7
  Top Layer w0.6: JP105.2 12.5,-60.4 14.905,-57.995 R120.1
NetJP106_2: JP106.2 R121.1 | length 11.8
  Top Layer w0.6: JP106.2 2.5,-62.3 9.805,-54.995 R121.1
NetJP107_2: JP107.2 R122.1 | length 8
  Top Layer w0.6: JP107.2 6.799,-51.001 8.458,-49.342 R122.1
NetJP108_2: JP108.2 R106.2 | length 4.3
  Top Layer w0.6: JP108.2 2.365,-33.295 R106.2
NetJP108_3: JP108.3 R107.2 | length 4.2
  Top Layer w0.6: JP108.3 2.125,-30.995 R107.2
NetJP108_4: JP108.4 R108.2 | length 4.2
  Top Layer w0.6: JP108.4 6.027,-28.58 R108.2
NetJP108_5: JP108.5 R109.2 | length 4.3
  Top Layer w0.6: JP108.5 2.355,-26.395 R109.2
NetQ1_1: Q1.1 R1.2 R17.1 | length 15.8
  Top Layer w1: Q1.1 51.958,-20.658 49.9,-22.716 49.9,-25.4 52.193,-27.693 R1.2@53.112,-27.693 ; 52.007,-20.707 R17.1@53.088,-20.707
NetQ2_1: Q2.1 R2.2 R18.1 | length 15.8
  Top Layer w1: Q2.1 71.958,-20.658 69.9,-22.716 69.9,-25.4 72.193,-27.693 R2.2@73.112,-27.693 ; 72.007,-20.707 R18.1@73.088,-20.707
NetQ3_1: Q3.1 R5.2 R19.1 | length 15.8
  Top Layer w1: Q3.1 91.958,-20.658 89.9,-22.716 89.9,-25.4 92.193,-27.693 R5.2@93.112,-27.693 ; 92.007,-20.707 R19.1@93.088,-20.707
NetQ3_1: 
NetQ3_1: 
NetQ3_1: 
NetQ3_1: 
NetQ3_1: 
NetQ3_1: 
NetQ3_1: 
NetQ3_1: 
NetQ3_1: 
NetQ3_1: 
NetQ4_1: Q4.1 R6.2 R20.1 | length 31.6
  Top Layer w1: 109.9,-25.4 109.9,-22.716 ; 109.9,-25.4 112.193,-27.693 ; 109.9,-25.4 109.9,-22.716 ; 109.9,-25.4 112.193,-27.693 ; 109.9,-22.716 111.958,-20.658 ; 109.9,-22.716 111.958,-20.658 ; 111.958,-20.658 Q4.1 111.958,-20.658 ; 112.193,-27.693 113.112,-27.693 112.193,-27.693 ; 112.007,-20.707 113.088,-20.707 112.007,-20.707
NetQ4_1: 
NetQ5_1: Q5.1 R9.2 R21.1 | length 15.9
  Top Layer w1: R9.2 60.207,-37.207 62.5,-39.5 62.5,-42.184 60.442,-44.242 ; R21.1 60.393,-44.193 60.442,-44.242 ; Q5.1 60.442,-44.242
NetQ6_1: Q6.1 R10.2 R22.1 | length 15.8
  Top Layer w1: R10.2 80.207,-37.207 82.5,-39.5 82.5,-42.184 80.442,-44.242 Q6.1 ; R22.1 80.393,-44.193
NetQ6_1: 
NetQ6_1: 
NetQ6_1: 
NetQ6_1: 
NetQ6_1: 
NetQ6_1: 
NetQ6_1: 
NetQ6_1: 
NetQ6_1: 
NetQ6_1: 
NetQ7_1: Q7.1 R13.2 R23.1 | length 15.8
  Top Layer w1: R13.2 100.207,-37.207 102.5,-39.5 102.5,-42.184 100.442,-44.242 Q7.1 ; R23.1 100.393,-44.193
NetQ8_1: Q8.1 R14.2 R24.1 | length 15.8
  Top Layer w1: R14.2 120.207,-37.207 122.5,-39.5 122.5,-42.184 120.442,-44.242 Q8.1 ; R24.1 120.393,-44.193
NetQ8_1: 
NetQ8_1: 
NetQ8_1: 
NetQ8_1: 
NetQ8_1: 
NetQ8_1: 
NetQ8_1: 
NetQ8_1: 
NetQ8_1: 
NetQ8_1: 
NetQ9_1: 
NetQ9_1: 
NetQ9_1: 
NetQ9_1: 
NetQ9_1: 
NetQ9_1: 
NetQ9_1: 
NetQ9_1: 
NetQ9_1: 
NetQ9_1: 
NetQ9_1: 
NetQ9_1: 
NetQ10_1: 
NetQ11_1: 
NetQ12_1: 
NetQ13_1: 
NetQ14_1: 
NetQ15_1: 
NetQ16_1: 
NetQ16_3: 
NetQ17_1: 
NetQ17_1: 
NetQ17_3: 
NetQ18_1: 
NetQ18_1: 
NetQ18_3: 
NetQ19_1: 
NetQ20_1: 
NetQ21_1: 
NetQ22_1: 
NetQ23_1: 
NetQ24_1: 
NetQ25_1: 
NetQ26_1: 
NetQ27_1: 
NetQ28_1: 
NetQ29_1: 
NetQ30_1: 
NetQ31_1: 
NetQ32_1: 
NetQ33_1: 
NetQ34_1: 
NetQ35_1: 
NetQ36_1: 
NetQ37_1: 
NetQ38_1: 
NetQ38_3: 
NetQ39_1: 
NetQ39_3: 
NetQ40_1: 
NetQ40_3: 
NetQ41_1: 
NetQ41_3: 
NetQ42_1: 
NetQ42_3: 
NetQ43_1: 
NetQ43_3: 
NetQ44_1: 
NetQ44_3: 
NetQ45_1: 
NetQ45_3: 
NetQ46_1: 
NetQ46_3: 
NetQ47_1: 
NetQ47_3: 
NetQ48_1: 
NetQ48_3: 
NetQ49_1: 
NetQ49_3: 
NetQ50_1: 
NetQ50_3: 
NetQ51_1: 
NetQ52_1: 
NetQ53_1: 
NetR1_1: 
NetR2_1: 
NetR3_1: 
NetR6_1: 
NetR7_2: 
NetR8_2: 
NetR9_2: 
NetR9_2: 
NetR11_2: 
NetR12_1: 
NetR12_2: 
NetR13_1: 
NetR14_2: 
NetR15_2: 
NetR18_1: 
NetR18_2: 
NetR19_2: 
NetR20_2: 
NetR20_2: 
NetR21_2: 
NetR24_2: 
NetR25_1: 
NetR26_1: 
NetR27_1: 
NetR29_1: 
NetR30_2: 
NetR31_1: 
NetR32_2: 
NetR33_2: 
NetR34_1: 
NetR34_2: 
NetR34_2: 
NetR35_1: R35.1 U3.1 | length 22.1
  Top Layer w0.5: U3.1 133.097,-8.203 133.5,-7.8
  Top Layer w1: R35.1 129.412,-7.388 130.5,-6.3 130.5,-2.7 131.5,-1.7 133.9,-1.7 135,-2.8 135,-6.3 133.5,-7.8
NetR36_1: R36.1 U4.1 | length 2.3
  Top Layer w0.5: U4.1 135.604,-10.507 R36.1
NetR36_2: 
NetR38_1: 
NetR38_2: 
NetR40_2: 
NetR42_1: 
NetR42_2: 
NetR45_1: 
NetR45_2: 
NetR46_1: 
NetR47_1: 
NetR48_1: 
NetR49_1: 
NetR93_1: 
NetR93_2: 
NetR94_2: 
NetR95_2: 
NetR96_1: 
NetR96_2: 
NetR99_1: 
NetR99_2: 
NetR102_1: 
NetR102_2: R102.2 U102.5 | length 2.7
  Top Layer w0.6: U102.5 12.685,-17.652 R102.2
NetR104_1: R104.1 U103.2 | length 2.7
  Top Layer w0.4: U103.2 35,-47.263 R104.1
NetR105_1: R105.1 U104.2 | length 2.5
  Top Layer w0.4: U104.2 25,-47.547 R105.1
NetR107_1: 
NetR107_2: 
NetR111_1: 
NetR111_2: 
NetR113_1: 
NetR113_2: 
NetR116_1: 
NetR116_2: 
NetR120_1: 
NetR120_2: 
NetR122_1: 
NetR122_2: 
NetR124_1: 
NetR124_2: 
NetR126_1: 
NetR126_2: 
NetR144_1: 
NetR144_2: 
NetR146_1: 
NetR146_2: 
NetR148_1: 
NetR148_2: 
NetR150_1: 
NetR150_2: 
NetR153_1: 
NetR153_2: 
NetR187_2: 
NetR188_2: 
NetR189_2: 
NetU1_3: 
NetU1_4: 
NetU2_3: 
NetU2_4: 
NetU3_3: 
NetU3_4: 
NetU4_3: 
NetU4_4: 
NetU101_43: U101.43
NetU101_44: U101.44
OSC1: C103.2 U101.2 Y100.1 | length 10.3
  Top Layer w0.4: C103.2 7.472,-39.005 U101.2 ; Y100.1@8,-36.808 8.828,-37.635 8.842,-37.635
OSC2: C104.2 U101.3 Y100.2 | length 12
  Top Layer w0.4: C104.2 6.003,-41.605 U101.3 ; 6.903,-40.706 6.903,-40.71 Y100.2@8,-41.808
OU11: 
OU12: 
OU13: 
OU14: 
OU15: 
OU16: 
OU17: 
OU18: 
OU21: 
OU22: 
OU23: 
OU24: 
OU25: 
OU26: 
OU26: 
OU27: 
OU28: 
OUT1: 
OUT2: 
OUT3: 
OUT4: 
OUT5: 
OUT6: 
OUT7: 
OUT8: 
PA0: 
PA0M: 
PA1: 
PA1M: 
PA2: 
PA2: 
PA2: 
PA2: 
PA2: 
PA2: 
PA2: 
PA2: 
PA2: 
PA2: 
PA2: 
PA2: 
PA2: 
PA2M: 
PA3: 
PA3M: 
PA4: 
PA4M: 
PA5: 
PA5M: 
PA6: 
PA6M: 
PA7: 
PA7M: 
PB0: U1.16 U3.4 | length 9.5
  Top Layer w0.5: U3.4 133.097,-18.897 135.3,-21.1 135.3,-23.55 U1.16
PB0M: 
PB1: U1.15 U4.4 | length 9.5
  Top Layer w0.5: U1.15 136.2,-23.782 136.2,-17.8 135.597,-17.197 U4.4
PB1M: 
PB2: R33.2 R34.1 U1.14 | length 16.1
  Top Layer w0.5: U1.14 143.701,-17.412 R33.2 145.807,-17.212 R34.1
PB2: 
PB3: 
PB4: 
PB4M: 
PB5: 
PB5M: 
PB6: 
PB6M: 
PB7: 
PB7M: 
PC0: 
PC0M: 
PC1: 
PC1M: 
PC2: 
PC2M: 
PC3: 
PC3M: 
PC4: 
PC4M: 
PC5: 
PC5M: 
PC6: 
PC6M: 
PC7: 
PC7M: 
PC22M: 
PD0: R6.1 R28.1 U1.25 | length 13.5
  Top Layer w0.5: R6.1 116.631,-27.912 127.158,-27.912 U1.25
PD0M: 
PD1: JP10.3 R5.1 R27.1 U1.26 | length 48.4
  Top Layer w0.5: R5.1 96.631,-27.912 108.512,-27.912 110.3,-29.7 126.4,-29.7 128,-31.3 128.682,-31.3 U1.26
  Bottom Layer w0.5: v2(126.5,-29.3) 126.5,-34.8 131.891,-40.191 JP10.3
PD1M: 
PD2: R2.1 R26.1 U1.27 | length 56.1
  Top Layer w0.5: R2.1 76.631,-27.912 R26.1 87.912,-27.912 90.6,-30.6 126,-30.6 127.5,-32.1 129.013,-32.1 U1.27
PD3: R1.1 R25.1 U1.28 | length 77.2
  Top Layer w0.5: R1.1 56.631,-27.912 68.112,-27.912 71.7,-31.5 125.5,-31.5 127,-33 129.245,-33 U1.28
PD3M: 
PD4: R9.1 R29.1 U1.29 | length 87.6
  Top Layer w0.5: R29.1 48.506,-37.1 56.4,-37.1 56.4,-34.7 57.9,-33.2 115.1,-33.2 116,-32.3 124.9,-32.3 126.5,-33.9 129.476,-33.9 U1.29
PD5: R10.1 R30.1 U1.30 | length 67.5
  Top Layer w0.5: R30.1 76.369,-37.088 76.7,-36.756 76.7,-35.2 77.8,-34.1 115.7,-34.1 116.6,-33.2 124.5,-33.2 124.6,-33.3 126.1,-34.8 129.707,-34.8 U1.30
PD5M: 
PD6: R13.1 R31.1 U1.31 | length 47.4
  Top Layer w0.5: R31.1 96.369,-37.088 96.7,-36.756 96.7,-35.8 97.5,-35 116.2,-35 117,-34.2 124.1,-34.2 125.7,-35.8 129.839,-35.8 U1.31
PD6M: 
PD7: R14.1 R32.1 U1.32 | length 28
  Top Layer w0.5: R32.1 116.369,-37.088 R14.1 116.488,-36.112 117.4,-35.2 123.7,-35.2 125.3,-36.8 129.97,-36.8 U1.32
PD7M: 
PE0: 
PE2: 
PE2: 
PE2: 
PE2: 
PE2: 
PE2: 
PE2: 
PE2: 
PE2: 
PE2: 
PE2: 
PE2: 
PE2: 
PE3: 
PE3: 
PE4: 
PE4: 
PE4: 
PE4: 
PE4: 
PE4: 
PE4: 
PE4: 
PE4: 
PE4: 
PE4: 
PE4: 
PE5: 
PE6: 
PE6: 
PE6: 
PE6: 
PE6: 
PE6: 
PE6: 
PE6: 
PE6: 
PE6: 
PE6: 
PE6: 
PE6: 
PE7: 
PE7: 
PE7: 
PE7: 
PE7: 
PE7: 
PE7: 
PE7: 
PE7: 
PE7: 
PE7: 
PE7: 
PF0: 
PF1: 
PF2: 
PF3: 
PF4: 
PF5: 
PF6: 
PF7: 
PG0: 
PG2: 
PG3: 
PG3: 
PG3: 
PG3: 
PG3: 
PG3: 
PG3: 
PG3: 
PG3: 
PG4: 
PG4: 
REFM: 
RES: 
RESET: 
RESM: 
RST: JP10.4 U1.1 | length 8.5
  Top Layer w0.5: JP10.4 129.588,-38.912 U1.1@134.7,-33.8
RSTUD: JP102.4 U101.1 | length 21.6
  Top Layer w0.4: v2(10.6,-33) 10.6,-33.005 U101.1 ; v2(12.4,-21.1) 14,-19.5 17.3,-19.5 18.388,-20.588 JP102.4
  Bottom Layer w0.4: v2(10.6,-33) 10.6,-25.3 12.4,-23.5 v2(12.4,-21.1)
S1: 
S2: 
S3: 
S4: 
S5: 
SCK: 
SI: 
SIN1: 
SIN2: 
SIN3: 
SIN4: 
SIN5: 
SIN6: 
SIN7: 
SIN8: 
SO: 
SOUT4: 
SOUT5: 
SOUT6: 
SOUT7: 
SOUT8: 
pads on no net: JP1.0 JP2.0 JP3.0 JP4.0 JP5.0 JP6.0 JP7.0 JP8.0 JP9.0 JP11.0 JP12.0 JP13.0 JP100.0 JP100.7 JP100.8 JP101.0 JP101.7 JP101.8 JP103.0 JP104.0 JP105.0 JP106.0 JP107.0 T1.0 U1.2 U1.3 U1.8 U1.11 U1.12 U1.13 U1.17 U1.18 U1.19 U1.20 U1.21 U1.22 U1.23 U1.24 U101.5 U101.20 U101.23 U101.24 U101.25 U101.26 U101.27 U101.30 U101.31 U101.34 U101.35 U101.36 U101.41 U101.42 U102.8 U103.3 U103.5 U104.3 U104.5

## Polygon pours and split planes (outlines as drawn)
GNDUD on Top Layer (hatched 90Degree grid 0.1 track 0.3, remove dead copper): -0.6,0.5 -0.6,-65.9 19.1,-65.9 19.1,-49.3 40.9,-49.3 40.9,0.6 -0.6,0.6
GND on Top Layer (hatched 90Degree grid 0.1 track 0.3, remove dead copper): 40.1,-19.4 123.9,-19.4 123.9,-13.4 147.5,-13.4 147.5,-54.2 151.9,-54.2 151.9,-66.9 125.1,-66.9 125.1,-45.5 39.9,-45.5 39.9,-19.4
GNDUD on Bottom Layer (hatched 90Degree grid 0.1 track 0.3, remove dead copper): -1.2,0.7 -1.2,-66.5 19,-66.5 19,-49.2 41,-49.2 41,0.8 -1.2,0.8
+5V_UD on Bottom Layer (hatched 90Degree grid 0.1 track 0.3, remove dead copper): 10.8,-32.5 18.3,-25 18.6,-25 26,-32.4 18.5,-39.9 18.4,-40 10.9,-32.5
+5V on Bottom Layer (hatched 90Degree grid 0.1 track 0.3, remove dead copper): 133.7,-22.4 127.6,-28.5 127.6,-29.4 133.9,-35.7 140.7,-28.9 134,-22.2 133.7,-22.5
GND on Bottom Layer (hatched 90Degree grid 0.1 track 0.3, remove dead copper): 40.3,-19.4 123.9,-19.4 123.9,-13.4 147.5,-13.4 147.5,-54.3 151.9,-54.3 151.9,-65.6 125.1,-65.6 125.1,-45.5 40.5,-45.5 40.5,-19.4

## Keep-outs
Keep-Out Layer:
  lines w0.254: 40,-65 0,-65 0,0 40,0 200,0 200,-65
  lines w0.3: 40,-65 200,-65

## Text inside footprints (layer, text, board x,y; h text height)
U2: Top Overlay "3" at 138.834,-45.81 h1.5 r90; Top Overlay "1" at 138.834,-50.138 h1.5 r90
U100: Top Overlay "3" at 30.166,-29.39 h1 r270; Top Overlay "1" at 30.166,-25.062 h1 r270